# Altium PCB Main.PcbDoc (part 2 of 2)
Units mil, origin at the board's own origin, x right, y up, seen from the top; angles counter-clockwise.
Board outline 5000 x 4200 mil, 4 copper layers (Top Layer, Gnd 1, Power, Gnd 2), stack 62.4 mil thick; 162 components, 132 nets, 664 pads, 567 vias.
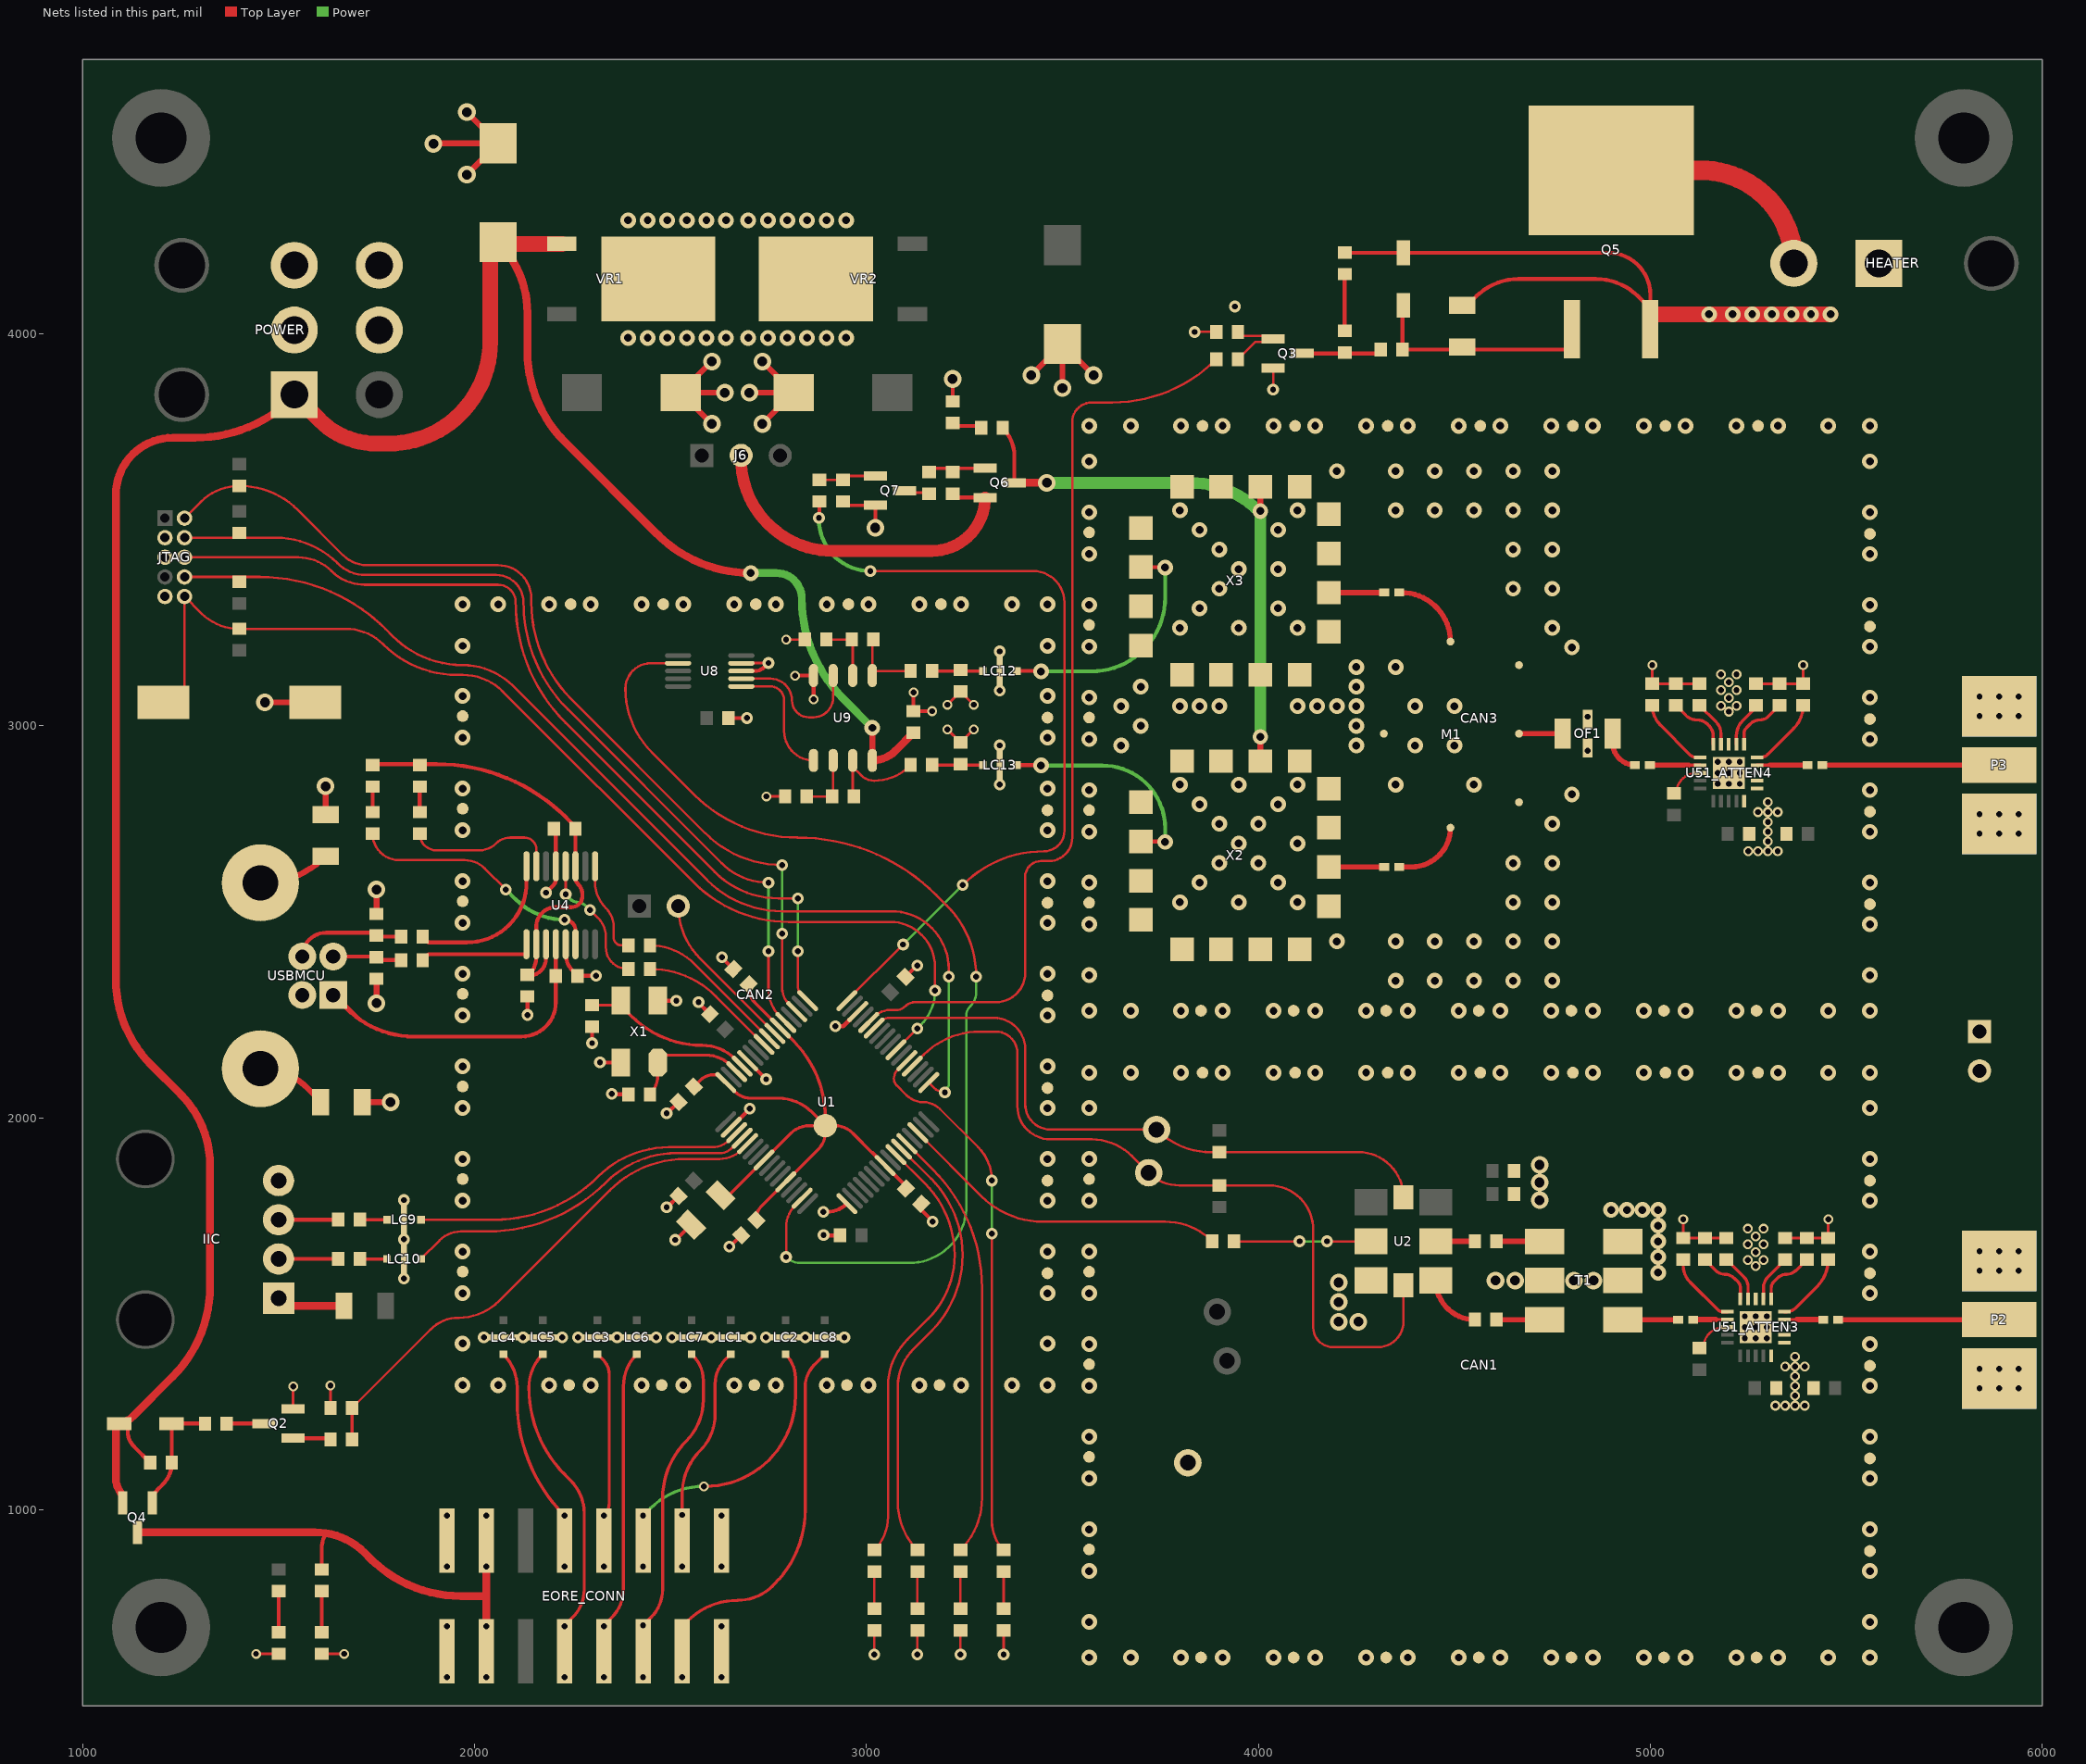
[diagram p4: the nets of this part, all layers, seen from the top]

## Via types
v1: diameter 40, hole 20, Top Layer to Gnd 2, tented both sides, 312 vias
v2: diameter 25, hole 15, Top Layer to Gnd 2, tented both sides, 105 vias
v3: diameter 30, hole 15, Top Layer to Gnd 2, tented both sides, 93 vias
v4: diameter 45, hole 25, Top Layer to Gnd 2, tented both sides, 37 vias
v5: diameter 25, hole 15, Top Layer to Gnd 2, 18 vias
v6: diameter 50, hole 30, Top Layer to Gnd 2, tented both sides, 1 vias
v7: diameter 60, hole 40, Top Layer to Gnd 2, tented both sides, 1 vias

## Nets (pads, with @x,y where several pads share a name; then routed paths per layer and width w, separated by ;. In a path a pad name is that pad's centre, name@x,y a point inside that pad or via, vN(x,y) a via of type N, cw(c..) or ccw(c..) an arc to the next point about the centre after c; other vN are vias at no path point) (continued)
GND: C4.1 C5.1 C6.1 C7.1 C8.1 C9.1 C10.1 C12.1 C14.1 C15.1 C16.1 C19.1 C20.1 C21.1 C22.1 C54_ATTEN3.1 C54_ATTEN4.1 C56_ATTEN3.1 C56_ATTEN4.1 CAN1.1 CAN2.1 CAN3.1 CB6.2 CB7.2 CB8.2 CBP2.2 CR3.2 CR4.2 CU1.1 CU2.1 CU3.1 CX1.1 CX2.1 EORE_CONN.1 EORE_CONN.2 EORE_CONN.15 EORE_CONN.16 GND.1 GND.2 HEATER.1 IIC.4 JTAG.3 JTAG.5 JTAG.9 LC1.2 LC2.2 LC3.2 LC4.2 LC5.2 LC6.2 LC7.2 LC8.2 LC9.2 LC10.2 LC12.2 LC13.2 M1.4 M1.5 M1.6 OF1.2 OF1.4 P2.2 P3.2 POWER.2 POWER.5 Q2.2 Q3.2 Q7.2 R19.2 R21.1 R45.1 R51_ATTEN3.2 R51_ATTEN4.2 R52_ATTEN3.2 R52_ATTEN4.2 R53_ATTEN3.2 R53_ATTEN4.2 R54_ATTEN3.2 R54_ATTEN4.2 R55_ATTEN3.2 R55_ATTEN4.2 R56_ATTEN3.2 R56_ATTEN4.2 RC3.1 RC4.1 RD8.2 RD9.2 RD10.2 RD11.2 RESET.2 RG2.1 RG4.1 RL1.2 RL2.2 RLED8.2 T1.2 T1.3 T1.5 TP5.1 U1.2 U1.17 U1.46 U1.60 U2.3 U4.5 U4.13 U8.3 U8.4 U9.4 U51_ATTEN3.10 U51_ATTEN3.11 U51_ATTEN3.12 U51_ATTEN3.18 U51_ATTEN3.21 U51_ATTEN4.10 U51_ATTEN4.11 U51_ATTEN4.12 U51_ATTEN4.18 U51_ATTEN4.21 USBMCU.4 VR1.4 VR2.4 X1.2 X1.4 X2.1 X2.3 X2.4 X2.5 X2.6 X2.7 X2.8 X2.9 X2.11 X2.12 X2.13 X2.15 X2.16 X3.1 X3.3 X3.4 X3.5 X3.6 X3.7 X3.8 X3.9 X3.11 X3.12 X3.13 X3.15 X3.16 | length 5117.6
  Top Layer w6: U8.4@2680.71,3160.32 v3(2750,3160.32) ; v3(3020,630.87) RD8.2@3020,692.44 ; v3(3130,630.87) RD9.2@3130,692.44 ; v3(3240,630.87) RL2.2@3240,692.44 ; v3(3350,630.87) RL1.2@3350,692.44 ; v3(3837.44,4005) R45.1@3892.44,4005 ; v3(4037.6,3857.6) Q3.2@4037.6,3912.6
  Top Layer w7: v2(1442.56,632.44) RLED8.2@1500,632.44 ; Q2.2@1537.4,1257.4 v2(1537.4,1314.84) ; RD10.2@1610,632.44 v2(1667.44,632.44) ; RG2.1@1632.44,1260 v2(1632.44,1317.44) ; v2(2745,2820) R21.1@2792.44,2820 ; v2(2795,3220) R19.2@2842.44,3220 ; v2(3206.45,2991.1) C21.1@3240,2957.56 v2(3273.55,2991.1) ; v2(3206.45,3053.9) C22.1@3240,3087.44 v2(3273.55,3053.9) ; R54_ATTEN4.2@5005,3107.56 v2(5005,3155) ; R54_ATTEN4.2@5015,3107.56 R55_ATTEN4.2@5125,3107.56 ; v2(5084,1740.77) R54_ATTEN3.2@5084,1693.33 R55_ATTEN3.2@5194,1693.33 ; R51_ATTEN4.2@5275,3107.56 R52_ATTEN4.2@5385,3107.56 ; R51_ATTEN3.2@5344,1693.33 R52_ATTEN3.2@5454,1693.33 v2(5454,1740.77) ; R52_ATTEN4.2@5390,3107.56 v2(5390,3155)
  Top Layer w8: RG4.1@2940,3572.44 ccw(c2949.84,3572.44) 2949.84,3562.6 Q7.2@3022.6,3562.6
  Top Layer w10: v3(2135,2262.44) CU2.1@2135,2309.88 ; v3(2182.5,2574.41) 2200,2591.91 ccw(c2181.89,2610.02) 2207.5,2610.02 U4.5@2207.5,2641.85 CU3.1@2207.5,2732.38 ; U4.13@2232.5,2443.03 2232.5,2419.39 ccw(c2297.41,2419.39) 2251.51,2373.49 CU1.1@2262.56,2362.44 v3(2310,2362.44) ; v3(2300,2190.43) CX2.1@2300,2232.44 ; v3(2320,2141.26) X1.4@2372.76,2141.26 ; v3@2350.43,2060 CX1.1@2392.44,2060 ; X1.2@2467.24,2298.74 v3(2515,2298.74) ; v3@2490.81,1770.81 C7.1@2520.51,1800.51 ; v3@2490.81,2010.81 C14.1@2520.51,2040.51 ; v3@2512.71,1687.71 C9.1@2552.42,1727.42 ; v3@2570.81,2294.19 C15.1@2600.51,2264.49 ; v3@2630.81,2409.19 C8.1@2660.51,2379.49 ; C19.1@2647.56,3020 v3(2695,3020) ; v3@2650.81,1670.81 C10.1@2680.51,1700.51 ; U1.2@2655.02,1975.97 v3(2702.22,2023.17) ; U8.3@2680.71,3140 2715.54,3140 ccw(c2715.54,3174.14) v3@2739.66,3149.98 ; U1.60@2696.78,2145.79 v3(2743.98,2098.58) ; v3@2739.68,3150 v3(2750,3160.32) ; v2(2817.56,3128.27) U9.4@2865,3128.27 v2(2865,3067.56) ; v3(2890,1760) 2899.17,1760 ccw(c2899.17,1832.04) U1.17@2950.11,1781.1 ; v3@2890.43,1700 C16.1@2932.44,1700 ; v3(2920.74,2233.86) 2940.74,2233.86 U1.46@2977.95,2271.06 ; v4(3022.6,3505.16) Q7.2@3022.6,3562.6 ; C6.1@3099.49,2359.49 v3@3129.19,2389.19 ; v2(3120,3085) C20.1@3120,3037.56 v2(3167.44,3037.56) ; C12.1@3139.49,1780.51 3139.49,1765.51 v3@3169.19,1735.81 ; RD11.2@3220,3827.56 v4(3220,3885)
  Top Layer w15: v4(1465.24,3060) RESET.2@1593.9,3060 ; RC3.1@1620,2773.15 v4(1620,2845.71) ; RC4.1@1713.15,2040 v4(1785.71,2040) ; v4(1750,2292.32) CR3.2@1750,2354.88 ; CR4.2@1750,2520 v4(1750,2582.56) ; v4@1895,4485.98 CB8.2@2060,4485.98 ; v4(1980.41,4406.39) CB8.2@2060,4485.98 ; v4(1980.41,4565.58) CB8.2@2060,4485.98 ; v4(2605.58,3770.41) CB7.2@2525.98,3850 ; v4(2605.58,3929.59) CB7.2@2525.98,3850 ; v4(2638.54,3850) CB7.2@2525.98,3850 ; v4(2701.46,3850) CB6.2@2814.02,3850 ; v4(2734.42,3770.41) CB6.2@2814.02,3850 ; v4(2734.42,3929.59) CB6.2@2814.02,3850 ; v4(3420.41,3894.42) CBP2.2@3500,3974.02 ; v4(3500,3861.46) CBP2.2@3500,3974.02 ; v4(3579.59,3894.42) CBP2.2@3500,3974.02
  other v1: 3568.19,623.19 3674.49,623.19 3802.44,623.19 3908.74,623.19 4038.66,623.19 4144.96,623.19 4274.88,623.19 4381.18,623.19 4511.1,623.19 4617.4,623.19 4747.32,623.19 4853.62,623.19 4983.54,623.19 5089.84,623.19 5219.76,623.19 5326.06,623.19 5454.02,623.19 5560.31,623.19 3568.19,713.74 5560.31,713.74 3568.19,843.66 5560.32,843.66 3568.19,949.96 5560.32,949.96 3568.19,1079.88 5560.32,1079.88 3568.19,1186.18 5560.32,1186.18 3568.19,1316.1 5560.32,1316.1 1969.68,1318.19 2060.24,1318.19 2190.16,1318.19 2296.46,1318.19 2426.38,1318.19 2532.68,1318.19 2662.6,1318.19 2768.9,1318.19 2898.82,1318.19 3005.12,1318.19 3135.04,1318.19 3241.34,1318.19 3371.26,1318.19 3461.81,1318.19 3568.19,1422.4 5560.32,1422.4 1969.68,1424.49 3461.81,1424.49 1969.68,1552.44 3461.81,1552.44 3568.19,1552.32 5560.32,1552.32 5020,1605 5020,1645 1969.68,1658.74 3461.81,1658.74 3568.19,1658.62 5560.32,1658.62 5020,1685 5020,1725 4900,1765 4940,1765 4980,1765 5020,1765 1969.68,1788.66 3461.81,1788.66 3568.19,1788.54 5560.32,1788.54 1969.68,1894.96 3461.81,1894.96 3568.19,1894.84 5560.32,1894.84 1969.68,2024.88 3461.81,2024.88 3568.19,2024.76 5560.31,2024.76 3568.19,2115.32 3674.49,2115.32 3802.44,2115.32 3908.74,2115.32 4038.66,2115.32 4144.96,2115.32 4274.88,2115.32 4381.18,2115.32 4511.1,2115.32 4617.4,2115.32 4747.32,2115.32 4853.62,2115.32 4983.54,2115.32 5089.84,2115.32 5219.76,2115.32 5326.06,2115.32 5454.02,2115.32 5560.31,2115.31 1969.68,2131.18 3461.81,2131.18 1969.68,2261.1 3461.81,2261.1 3568.19,2273.19 3674.49,2273.19 3802.44,2273.19 3908.74,2273.19 4038.66,2273.19 4144.96,2273.19 4274.88,2273.19 4381.18,2273.19 4511.1,2273.19 4617.4,2273.19 4747.32,2273.19 4853.62,2273.19 4983.54,2273.19 5089.84,2273.19 5219.76,2273.19 5326.06,2273.19 5454.02,2273.19 5560.31,2273.19 4350,2350 4450,2350 4550,2350 4650,2350 4750,2350 3568.19,2363.74 5560.31,2363.74 1969.68,2367.4 3461.81,2367.4 4200,2450 4350,2450 4450,2450 4550,2450 4650,2450 4750,2450 3568.19,2493.66 5560.32,2493.66 1969.68,2497.32 3461.81,2497.32 3800,2550 3950,2550 4100,2550 4650,2550 4750,2550 3568.19,2599.96 3850,2600 4050,2600 5560.32,2599.96 1969.68,2603.62 3461.81,2603.62 3900,2650 4000,2650 4650,2650 4750,2650 3950,2700 4100,2700 3568.19,2729.88 5560.32,2729.88 1969.68,2733.54 3461.81,2733.54 3900,2750 4000,2750 4750,2750 3850,2800 4050,2800 4800,2825 3568.19,2836.18 5560.32,2836.18 1969.68,2839.84 3461.81,2839.84 3800,2850 3950,2850 4100,2850 4350,2850 4550,2850 3650,2950 4250,2950 4400,2950 4500,2950 3568.19,2966.1 5560.32,2966.1 1969.68,2969.76 3461.81,2969.76 3700,3000 4250,3000 3650,3050 3800,3050 3850,3050 3900,3050 4100,3050 4150,3050 4200,3050 4250,3050 4400,3050 4500,3050 3568.19,3072.4 5560.32,3072.4 1969.68,3076.06 3461.81,3076.06 3700,3100 4250,3100 4250,3150 4350,3150 4800,3200 3568.19,3202.32 5560.32,3202.32 1969.68,3204.02 3461.81,3204.02 3800,3250 3950,3250 4100,3250 4750,3250 3850,3300 4050,3300 3568.19,3308.62 5560.32,3308.62 1969.69,3310.32 2060.24,3310.32 2190.16,3310.32 2296.46,3310.32 2426.38,3310.32 2532.68,3310.32 2662.6,3310.32 2768.9,3310.32 2898.82,3310.32 3005.12,3310.32 3135.04,3310.32 3241.34,3310.32 3371.26,3310.32 3461.81,3310.31 3900,3350 4650,3350 4750,3350 3950,3400 4050,3400 3568.19,3438.54 5560.32,3438.54 3900,3450 4650,3450 4750,3450 3850,3500 4050,3500 3568.19,3544.84 5560.32,3544.84 3800,3550 4100,3550 4350,3550 4450,3550 4550,3550 4650,3550 4750,3550 4200,3650 4350,3650 4450,3650 4550,3650 4650,3650 4750,3650 3568.19,3674.76 5560.31,3674.76 3568.19,3765.32 3674.49,3765.32 3802.44,3765.32 3908.74,3765.32 4038.66,3765.32 4144.96,3765.32 4274.88,3765.32 4381.18,3765.32 4511.1,3765.32 4617.4,3765.32 4747.32,3765.32 4853.62,3765.32 4983.54,3765.32 5089.84,3765.32 5219.76,3765.32 5326.06,3765.32 5454.02,3765.32 5560.31,3765.31 2391.69,3990 2441.69,3990 2491.69,3990 2541.69,3990 2591.69,3990 2641.69,3990 2698.31,3990 2748.31,3990 2798.31,3990 2848.31,3990 2898.31,3990 2948.31,3990 2391.69,4290 2441.69,4290 2491.69,4290 2541.69,4290 2591.69,4290 2641.69,4290 2698.31,4290 2748.31,4290 2798.31,4290 2848.31,4290 2898.31,4290 2948.31,4290
  other v2: 1930,573 2630,573 1930,703 2630,703 1930,855 2630,855 1930,985 2630,985 5319,1265.77 5344,1265.77 5369,1265.77 5394,1265.77 5369,1290.77 5369,1315.77 5369,1340.77 5344,1365.77 5369,1365.77 5394,1365.77 5369,1390.77 5269,1622.07 5249,1637.07 5289,1637.07 5269,1657.07 5249,1677.07 5289,1677.07 5269,1697.07 5249,1717.07 5289,1717.07 5250,2680 5275,2680 5300,2680 5325,2680 5300,2705 5300,2730 5300,2755 5275,2780 5300,2780 5325,2780 5300,2805 4840,2936.5 4840,3023.5 5200,3036.3 5180,3051.3 5220,3051.3 5200,3071.3 5180,3091.3 5220,3091.3 5200,3111.3 5180,3131.3 5220,3131.3
  other v3: 2023.78,1440 2123.78,1440 2223.78,1440 2263.78,1440 2363.78,1440 2463.78,1440 2503.78,1440 2603.78,1440 2703.78,1440 2743.78,1440 2843.78,1440 2943.78,1440 1820,1590 2650.03,1671.59 2511.93,1688.49 1820,1690 2890.43,1701.1 3168.41,1735.03 2490.03,1771.59 1820,1790 2490.03,2011.59 2350.43,2061.1 2571.59,2294.97 3129.97,2388.41 2631.59,2409.97 3340,2850 3340,2950 3340,3090 3340,3190 3939.76,4069.9
  other v4: 4205,1480 4255,1480 4205,1530 4205,1580 4605,1585 4655,1585 4805,1585 4855,1585 4717.56,1790 4717.56,1835 4717.56,1880 1895,4485
  other v5: 5241,1437.77 5269,1437.77 5297,1437.77 5241,1465.77 5269,1465.77 5297,1465.77 5241,1493.77 5269,1493.77 5297,1493.77 5172,2852 5200,2852 5228,2852 5172,2880 5200,2880 5228,2880 5172,2908 5200,2908 5228,2908
HEAT: R43.1 U1.44 | length 2365.7
  Top Layer w6: U1.44@3005.79,2243.22 3021.7,2259.14 cw(c3060,2220.83) 3060,2275 3074.97,2275 ccw(c3074.97,2310.09) 3099.78,2285.28 cw(c3123.25,2261.81) 3102.11,2287.4 cw(c3123.25,2261.81) 3123.25,2295 3330,2295 ccw(c3330,2370) 3405,2370 3405,2615 cw(c3445,2615) 3445,2655 3465,2655 ccw(c3465,2715) 3525,2715 3525,3775 cw(c3575,3775) 3575,3825 3626.88,3825 ccw(c3626.88,4200.56) R43.1@3892.44,3935
HEAT_PWR: D17.1 D18.1 POWER.3 POWER.6 Q5.3 R49.2 | length 1963.9
  Top Layer w10: D17.1@4220,4207.56 4220,4206.93 D18.1@4370,4206.93 4893.07,4206.93 cw(c4893.07,4100) 5000,4100 Q5.3@5000,4065 ; R49.2@4520,4073.15 ccw(c4520,4104.9) 4542.45,4082.45 4555,4095 cw(c4663.64,3986.36) 4663.64,4140 4861.36,4140 cw(c4861.36,3986.36) 4970,4095 Q5.3@5000,4065 ; Q5.3@5000,4011.97 Q5.3@5000,4065
  Top Layer w40: Q5.3@5000,4000 5000,4050 v1(5150,4050) v1(5460,4050)
  other v1: 5210,4050 5260,4050 5310,4050 5360,4050 5410,4050
LV_CLK: EORE_CONN.12 LC2.1 | length 656.2
  Top Layer w8: v2(2585,1060) 2588.78,1060 ccw(c2588.78,1290) 2818.78,1290 2818.78,1336.34 ccw(c2733.42,1336.34) 2793.86,1396.62 ccw(c2733.42,1336.34) LC2.1@2793.78,1396.69
  Power w8: v2(2430,985) 2448.43,1003.43 cw(c2585,866.86) v2(2585,1060)
  other v2: 2430,855
LV_CS_1: EORE_CONN.14 LC1.1 | length 511
  Top Layer w8: EORE_CONN.14@2530,921 v2(2530,987) 2530,1041.36 cw(c2683.64,1041.36) 2530.27,1050.41 cw(c2683.64,1041.36) 2575,1150 ccw(c2481.38,1243.62) 2613.78,1243.62 2613.78,1321.34 cw(c2699.13,1321.34) 2638.74,1381.66 cw(c2699.13,1321.34) 2638.78,1381.69 LC1.1@2653.78,1396.69
  other v2: 2530,855
LV_CS_2: EORE_CONN.11 LC7.3 | length 744.4
  Top Layer w8: v2(2430,705) 2450,725 ccw(c2377.57,797.43) 2480,797.43 2480,1030.15 cw(c2684.85,1030.15) 2540,1175 ccw(c2434.31,1280.69) 2583.78,1280.69 2583.78,1330 ccw(c2495.19,1330) 2557.83,1392.64 LC7.3@2553.78,1396.69
  other v2: 2430,573
LV_CS_3: EORE_CONN.9 LC6.1 | length 717
  Top Layer w8: EORE_CONN.9@2330,705 2350,725 ccw(c2277.57,797.43) 2380,797.43 2380,1315.14 cw(c2495.33,1315.14) LC6.1@2413.78,1396.69
  other v2: 2330,573 2330,703
LV_SW_1: EORE_CONN.7 LC5.1 | length 757.1
  Top Layer w8: LC5.1@2173.78,1396.69 ccw(c2258.28,1312.2) 2142.88,1343.24 ccw(c2258.28,1312.2) 2138.78,1312.2 ccw(c2454.98,1312.2) 2231.39,1088.61 2245,1075 cw(c2160.5,990.5) 2280,990.5 2280,797.43 cw(c2177.57,797.43) 2250,725 EORE_CONN.7@2230,705
  other v2: 2230,573 2230,703
LV_SW_2: EORE_CONN.8 LC4.3 | length 453.5
  Top Layer w8: LC4.3@2073.78,1396.69 cw(c1989.28,1312.2) 2108.78,1312.2 2108.78,1277.65 ccw(c2522.65,1277.65) v2(2230,985)
  other v2: 2230,855
LV_SW_3: EORE_CONN.10 LC3.3 | length 425.6
  Top Layer w8: LC3.3@2313.78,1396.69 2328.78,1381.69 cw(c2292.57,1345.48) 2343.78,1345.48 2343.78,1018.26 cw(c2296.74,1018.26) v2(2330,985)
  other v2: 2330,855
MIXERV+: D10.1 Q6.3 X2.14 X3.14 | length 1490.9
  Top Layer w10: D10.1@3347.56,3760 cw(c3275.51,3687.95) 3377.4,3687.95 Q6.3@3377.4,3620
  Top Layer w15: X2.14@4005,2910 v1(4005,2972.01) ; v1(4005,3547.99) X3.14@4005,3610
  Top Layer w20: Q6.3@3377.4,3620 v4(3460,3620)
  Power w30: v4(3460,3620) 3827.26,3620 cw(c3827.26,3374.15) v1@4001.1,3547.99 ; v1(4005,2972.01) v1(4005,3547.99)
ND_EN: RG1.1 RG2.2 U1.5 | length 1342.7
  Top Layer w6: RG2.2@1687.56,1260 1887.55,1459.99 cw(c1960,1387.54) 1960,1490 ccw(c1960,1634.85) 2062.43,1532.43 2345,1815 cw(c2538.14,1621.86) 2538.14,1895 2625,1895 ccw(c2625,1973.62) U1.5@2680.56,1917.99 ; U1.5@2680.59,1918.03 U1.5@2696.78,1934.21
  Top Layer w8: RG1.1@1687.56,1180 RG2.2@1687.56,1260
NetC1_1: C1.1 U2.4 | length 156.9
  Top Layer w13.45: U2.4@4452.68,1584.76 ccw(c4552.44,1584.76) C1.1@4552.44,1485
  Top Layer w30: U2.4@4452.68,1584.76 U2.4@4452.68,1585
NetC1_2: C1.2 T1.6 | length 122.4
  Top Layer w13.45: C1.2@4607.56,1485 T1.6@4730,1485
NetC2_1: C2.1 U2.5 | length 99.8
  Top Layer w13.45: U2.5@4452.68,1685 C2.1@4552.44,1685
NetC2_2: C2.2 T1.4 | length 122.4
  Top Layer w13.45: C2.2@4607.56,1685 T1.4@4730,1685
NetC21_2: C21.2 LC13.1 R24.1 | length 129.1
  Top Layer w8: R24.1@3167.56,2900 LC13.1@3296.69,2900
NetC22_2: C22.2 LC12.1 R23.1 | length 129.1
  Top Layer w8: R23.1@3167.56,3140 LC12.1@3296.69,3140
NetC28_1: C28.1 T1.1 | length 141
  Top Layer w13.45: T1.1@4930,1485 C28.1@5070.98,1485
NetC30_1: C30.1 OF1.3 | length 112.5
  Top Layer w13.45: OF1.3@4904,2980 4904,2956.98 ccw(c4960.98,2956.98) C30.1@4960.98,2900
NetC32_2: C32.2 M1.1 | length 202.3
  Top Layer w13.45: C32.2@4359.02,3340 4365,3340 cw(c4365,3215) M1.1@4490,3215
NetC33_2: C33.2 M1.2 | length 188.1
  Top Layer w13.45: C33.2@4359.02,2640 4390,2640 ccw(c4390,2740) M1.2@4490,2740
NetCU1_2: CU1.2 U4.12 USBMCU.1 | length 908.6
  Top Layer w10: USBMCU.1@1639.37,2313.23 1674.56,2278.04 ccw(c1845,2448.48) 1707.66,2250.39 ; USBMCU.1@1639.37,2318.23 1700,2257.6 ; 1700.03,2257.56 ccw(c1821.09,2378.69) 1707.66,2250.39 ; CU1.2@2207.44,2362.44 2207.44,2294.88 cw(c2120,2294.88) 2120,2207.44 1845,2207.44 cw(c1845,2448.48) 1707.66,2250.39 ; CU1.2@2207.5,2362.44 U4.12@2207.5,2443.03
  Top Layer w25: USBMCU.1@1638.14,2300.58 ccw(c1573.58,2313.23) USBMCU.1@1639.37,2313.23
NetCX1_2: CX1.2 U1.62 X1.1 | length 318.5
  Top Layer w8: CX1.2@2447.56,2060 ccw(c2400.04,2107.52) 2455,2068.85 ccw(c2400.04,2107.52) 2467.24,2107.52 X1.1@2467.24,2141.26 2467.24,2153.35 cw(c2476.65,2153.35) 2470,2160 2590,2160 cw(c2590,2070.95) 2652.97,2133.92 U1.62@2668.94,2117.95
NetCX2_2: CX2.2 U1.61 X1.3 | length 452.6
  Top Layer w8: CX2.2@2300,2287.56 2372.76,2287.56 X1.3@2372.76,2298.74 ccw(c2400.51,2298.74) 2380.88,2279.12 2400,2260 ccw(c2581.07,2441.07) 2581.07,2185 cw(c2581.07,2067.53) 2664.13,2150.59 U1.61@2682.86,2131.87
NetD1_1: D1.1 U1.37 | length 1390.1
  Top Layer w6: U1.37@3103.22,2145.79 3078.88,2121.45 ccw(c3100.33,2100) 3070,2100 ccw(c3094.14,2100) 3077.07,2082.93 3102.32,2057.68 ccw(c3145,2100.36) 3145,2040 cw(c3145,1979.64) 3187.68,2022.32 3284.64,1925.36 cw(c3199.29,1840) v3(3320,1840) ; v3(3320,1704.68) 3320,969.99 ccw(c3422.43,969.99) D1.1@3350,897.56
  Power w6: v3(3320,1704.68) v3(3320,1840)
NetD1_2: D1.2 RL1.1 | length 92.4
  Top Layer w6: RL1.1@3350,747.56 D1.2@3350,840
NetD2_1: D2.1 U1.28 | length 1112.4
  Top Layer w6: U1.28@3103.22,1934.21 3169.53,1867.9 cw(c2866.63,1565) 3169.61,1867.83 cw(c2866.63,1565) 3295,1565 3295,1030.34 cw(c3107.22,1030.34) D2.1@3240,897.56
NetD2_2: D2.2 RL2.1 | length 92.4
  Top Layer w6: RL2.1@3240,747.56 D2.2@3240,840
NetD5_1: D5.1 U1.26 | length 1122.3
  Top Layer w6: D5.1@3020,897.56 ccw(c2935.5,982.06) 3055,982.06 3055,1315 cw(c3223.99,1315) 3055.76,1330.98 cw(c3223.99,1315) 3104.5,1434.5 3157.82,1487.82 ; U1.26@3075.38,1906.37 3149.51,1832.25 cw(c2967.26,1650) 3225,1650 cw(c2995.65,1650) 3157.85,1487.85
NetD5_2: D5.2 RD8.1 | length 92.4
  Top Layer w6: RD8.1@3020,747.56 D5.2@3020,840
NetD6_1: D6.1 U1.27 | length 1139.4
  Top Layer w6: U1.27@3089.3,1920.29 3163.97,1845.63 cw(c2968.34,1650) 3164.01,1845.58 cw(c2968.34,1650) 3245,1650 cw(c2967.37,1650) 3163.74,1453.74 cw(c2967.37,1650) 3163.68,1453.68 3118.89,1408.89 ccw(c3212.78,1315) 3080.74,1328.98 ccw(c3212.78,1315) 3080,1315 3080,1018.27 ccw(c3250.71,1018.27) D6.1@3130,897.56
NetD6_2: D6.2 RD9.1 | length 92.4
  Top Layer w6: RD9.1@3130,747.56 D6.2@3130,840
NetD7_1: D7.1 EORE_CONN.3 EORE_CONN.4 Q4.3 | length 1312.2
  Top Layer w10: D7.1@1610,847.56 1610,898.5 cw(c1699.52,898.5) 1620.46,940.49
  Top Layer w20: Q4.3@1140,942.6 1593.02,942.6 cw(c1593.02,763.02) 1620.46,940.49 cw(c1593.02,763.02) 1720,890 1734.54,875.46 ccw(c1965,1105.92) 1965,780 2030,780 ; EORE_CONN.3@2030,639 2030,780 ; EORE_CONN.4@2030,921 2030,780
  other v2: 2030,573 2030,703 2030,855 2030,985
NetD7_2: D7.2 RD10.1 | length 92.4
  Top Layer w10: RD10.1@1610,687.56 D7.2@1610,780
NetD8_2: D8.2 Q4.1 R46.1 R47.1 | length 303.8
  Top Layer w10: Q4.1@1177.4,1017.4 1177.4,1019.58 cw(c1220.42,1019.58) 1190,1050 1204.62,1064.62 ccw(c1149.24,1120) R46.1@1227.56,1120 1227.56,1218.48 ccw(c1225.41,1218.48) D8.2@1226.93,1220 R47.1@1312.44,1220
NetD10_2: D10.2 RD11.1 | length 75.8
  Top Layer w10: RD11.1@3220,3772.44 ccw(c3237.96,3790.41) 3237.96,3765 3280.37,3765 cw(c3280.37,3747.93) D10.2@3292.44,3760
NetD17_2: D17.2 RD19.1 | length 144.9
  Top Layer w10: RD19.1@4220,4007.56 D17.2@4220,4152.44
NetD18_2: D18.2 Q5.1 R48.1 R49.1 | length 599.9
  Top Layer w10: D18.2@4370,4073.07 4367.56,4073.07 R48.1@4367.56,3960 4800,3960 Q5.1@4800,4011.97
NetDRX_2: DRX.2 RU4.1 | length 64.9
  Top Layer w10: RU4.1@1740,2780 DRX.2@1740,2844.88
NetDTX_2: DTX.2 RU3.1 | length 64.9
  Top Layer w10: RU3.1@1860,2780 DTX.2@1860,2844.88
NetEORE_CONN_13: EORE_CONN.13 LC8.3 | length 955.1
  Top Layer w8: EORE_CONN.13@2530,639 2530,703 2542.87,715.87 cw(c2671.35,587.4) 2671.35,769.09 ccw(c2671.35,896.42) 2702.02,772.84 ccw(c2671.35,896.42) 2761.38,806.38 2765,810 ccw(c2574.81,1000.19) 2843.78,1000.19 2843.78,1313.72 cw(c2923.39,1313.72) 2867.09,1370.01 LC8.3@2893.78,1396.69
  other v2: 2530,573
NetERASE_2: ERASE.2 U1.55 | length 418.5
  Top Layer w6: ERASE.2@2520,2540 ccw(c2708.89,2540) 2575.33,2406.43 U1.55@2766.37,2215.38
NetHEATER_2: HEATER.2 Q5.4 | length 601.6
  Top Layer w50: Q5.4@4900,4417.48 5128.52,4417.48 cw(c5128.52,4180) HEATER.2@5366,4180
NetIIC_1: IIC.1 R44.1 | length 186.9
  Top Layer w20: IIC.1@1500,1540 1500,1520 R44.1@1666.85,1520
NetIIC_2: IIC.2 R41.2 | length 152.4
  Top Layer w10: IIC.2@1500,1640 R41.2@1652.44,1640
NetIIC_3: IIC.3 R42.2 | length 152.4
  Top Layer w10: IIC.3@1500,1740 R42.2@1652.44,1740
NetJ3_1: J3.1 U2.2 | length 347
  Top Layer w6: J3.1@3940.34,1685 v3(4105,1685) ; v3(4175,1685) U2.2@4287.32,1685
  Power w6: v3(4105,1685) v3(4175,1685)
NetJ6_2: J6.2 Q6.2 R56.2 | length 931.6
  Top Layer w10: R56.2@3220,3592.44 ccw(c3229.84,3592.44) 3229.84,3582.6 Q6.2@3302.6,3582.6
  Top Layer w30: J6.2@2680,3690 2680,3681.21 ccw(c2915,3681.21) 2915,3446.21 3166.21,3446.21 ccw(c3166.21,3582.6) Q6.2@3302.6,3582.6
NetLC9_3: LC9.3 R42.1 | length 69.1
  Top Layer w8: R42.1@1707.56,1740 LC9.3@1776.69,1740
NetLC10_1: LC10.1 R41.1 | length 69.1
  Top Layer w8: R41.1@1707.56,1640 LC10.1@1776.69,1640
NetLC12_3: LC12.3 X3.2 | length 625
  Top Layer w10: LC12.3@3383.31,3140 v1@3445.31,3140 ; X3.2@3700,3405 v1@3762.01,3405
  Power w10: v1(3445.31,3138.9) 3573.9,3138.9 ccw(c3573.9,3327.01) 3762.01,3327.01 v1(3762.01,3403.9)
NetLC13_3: LC13.3 X2.2 | length 567
  Top Layer w10: LC13.3@3383.31,2900 v1@3445.31,2900 ; X2.2@3700,2705 v1@3762.01,2705
  Power w10: v1(3445.31,2898.9) 3602.01,2898.9 cw(c3602.01,2738.9) 3762.01,2738.9 v1(3762.01,2703.9)
NetLED8_2: LED8.2 RLED8.1 | length 92.4
  Top Layer w10: RLED8.1@1500,687.56 LED8.2@1500,780
NetM1_3: M1.3 OF1.1 | length 111
  Top Layer w13.45: M1.3@4665,2980 OF1.1@4776,2980
NetQ2_1: Q2.1 RG1.2 | length 95.7
  Top Layer w10: Q2.1@1537.4,1182.6 1626.17,1182.6 cw(c1626.17,1173.73) RG1.2@1632.44,1180
NetQ2_3: Q2.3 R47.2 | length 95
  Top Layer w10: R47.2@1367.56,1220 Q2.3@1462.6,1220
NetQ3_1: Q3.1 R43.2 R45.2 | length 207.9
  Top Layer w6: R43.2@3947.56,3935 3992.56,3980 Q3.1@4040.2,3980 ; R45.2@3947.56,4005 3957.56,3995 Q3.1@4040,3995
NetQ3_3: Q3.3 R48.2 RD19.2 | length 210
  Top Layer w10: Q3.3@4112.4,3950 4312.44,3950 R48.2@4312.44,3960
NetQ6_1: Q6.1 R56.1 R57.1 | length 148.2
  Top Layer w8: R57.1@3160,3647.56 cw(c3169.84,3647.56) 3169.84,3657.4 Q6.1@3302.6,3657.4
NetQ7_1: Q7.1 RG3.2 RG4.2 | length 137.6
  Top Layer w6: RG3.2@2880,3627.56 RG4.2@2940,3627.56
  Top Layer w7: RG4.2@2944.96,3637.4 Q7.1@3022.6,3637.4
NetQ7_3: Q7.3 R57.2 | length 66.9
  Top Layer w8: Q7.3@3097.4,3600 ccw(c3102.4,3600) 3102.4,3595 3157.44,3595 cw(c3157.44,3592.44) R57.2@3160,3592.44
NetR1_1: R1.1 U4.1 | length 243.4
  Top Layer w6: U4.1@2307.5,2641.85 2307.5,2601.39 ccw(c2401.39,2601.39) 2335,2535 cw(c2286.72,2486.72) 2355,2486.72 2355,2460 ccw(c2375,2460) 2375,2440 R1.1@2392.44,2440
NetR8_1: R8.1 U4.4 | length 338.6
  Top Layer w6: v3(2295,2530) 2315,2510 cw(c2266.72,2461.72) 2335,2461.72 2335,2435 ccw(c2390,2435) 2390,2380 R8.1@2392.44,2380
  Top Layer w8: v3(2232.5,2570) U4.4@2232.5,2641.85
  Power w8: v3@2237.5,2565 2244.28,2558.22 ccw(c2264.95,2578.9) 2248.73,2554.57 ccw(c2264.95,2578.9) 2264.95,2549.66 cw(c2260,2513.79) 2285.61,2539.39 v3(2295,2530)
NetR19_1: R19.1 R20.1 U9.2 | length 159.2
  Top Layer w7: R19.1@2897.56,3220 2965,3220 U9.2@2965,3128.27
NetR20_2: R20.2 R23.2 U9.1 | length 191.7
  Top Layer w6: U9.1@3015,3128.27 U9.1@3015,3140 ; R20.2@3017.56,3220 3015,3220 U9.1@3015,3140 ; R23.2@3112.44,3140 U9.1@3015,3140
NetR21_2: R21.2 R22.2 U9.6 | length 156.6
  Top Layer w6: R21.2@2847.56,2820 R22.2@2912.44,2820 ; R22.2@2915,2820 U9.6@2915,2911.73
NetR22_1: R22.1 R24.2 U9.7 | length 265.3
  Top Layer w6: U9.7@2965,2911.73 U9.7@2965,2895 ; R22.1@2967.56,2820 2965,2820 U9.7@2965,2895 ; 2985.86,2874.14 U9.7@2965,2895 ; 2985.88,2874.12 ccw(c3020,2908.28) 3020,2860 ccw(c3020,2986.6) R24.2@3109.49,2897.05 ; R24.2@3109.52,2897.08 R24.2@3112.44,2900
NetR51_ATTEN3_1: R51_ATTEN3.1 U51_ATTEN3.17 | length 120.9
  Top Layer w8: U51_ATTEN3.17@5288.69,1538.41 5288.69,1565.78 cw(c5330.01,1565.78) 5300.76,1594.97 ; 5300.79,1595 R51_ATTEN3.1@5344,1638.21
NetR51_ATTEN4_1: R51_ATTEN4.1 U51_ATTEN4.17 | length 120.4
  Top Layer w8: U51_ATTEN4.17@5219.69,2952.64 5219.69,2974.88 cw(c5273.39,2974.88) 5235.41,3012.86 R51_ATTEN4.1@5275,3052.44
NetR52_ATTEN3_1: R52_ATTEN3.1 U51_ATTEN3.15 | length 185.4
  Top Layer w8: U51_ATTEN3.15@5341.64,1505.14 5348.1,1505.14 ccw(c5348.1,1536.11) 5369.98,1514.19 5425.72,1569.93 ccw(c5357.43,1638.21) R52_ATTEN3.1@5454,1638.21
NetR52_ATTEN4_1: R52_ATTEN4.1 U51_ATTEN4.15 | length 188.2
  Top Layer w8: U51_ATTEN4.15@5272.64,2919.37 5280.51,2919.37 ccw(c5280.51,2946.93) 5299.99,2927.43 5365.25,2992.69 ; 5365.28,2992.72 ccw(c5305.5,3052.44) 5385,3023.81 ccw(c5305.5,3052.44) R52_ATTEN4.1@5390,3052.44
NetR53_ATTEN3_1: R53_ATTEN3.1 U51_ATTEN3.16 | length 149.7
  Top Layer w8: U51_ATTEN3.16@5308.37,1538.41 5308.37,1565.77 cw(c5331.01,1565.77) 5314.99,1581.76 5324.26,1591.03 ; 5324.28,1591.05 cw(c5347.78,1567.5) 5347.78,1600.77 ccw(c5347.78,1634.04) 5371.3,1610.52 R53_ATTEN3.1@5399,1638.21
NetR53_ATTEN4_1: R53_ATTEN4.1 U51_ATTEN4.16 | length 149.8
  Top Layer w8: U51_ATTEN4.16@5239.37,2952.64 5239.37,2981.41 cw(c5258.59,2981.41) 5245,2995 5255.26,3005.26 ; 5255.28,3005.28 cw(c5278.78,2981.73) 5278.78,3015 ccw(c5278.78,3048.27) 5302.3,3024.74 R53_ATTEN4.1@5330,3052.44
NetR54_ATTEN3_1: R54_ATTEN3.1 U51_ATTEN3.1 | length 187.7
  Top Layer w8: R54_ATTEN3.1@5084,1638.21 5084,1622.4 ccw(c5142.4,1622.4) 5101.11,1581.11 5171.71,1510.51 ccw(c5185,1523.8) 5182.7,1505.14 ccw(c5185,1523.8) 5185,1505 5196.22,1505 U51_ATTEN3.1@5196.36,1505.14
NetR54_ATTEN4_1: R54_ATTEN4.1 U51_ATTEN4.1 | length 190.9
  Top Layer w8: R54_ATTEN4.1@5005,3052.44 ccw(c5077.43,3052.44) 5015,3015.72 ccw(c5077.43,3052.44) 5026.21,3001.23 5101.22,2926.22 ccw(c5117.76,2942.76) 5117.76,2919.37 U51_ATTEN4.1@5127.36,2919.37
NetR55_ATTEN3_1: R55_ATTEN3.1 U51_ATTEN3.19 | length 121.3
  Top Layer w8: R55_ATTEN3.1@5194,1638.21 5240,1592.21 cw(c5217.51,1569.72) 5249.32,1569.72 U51_ATTEN3.19@5249.32,1538.41
NetR55_ATTEN4_1: R55_ATTEN4.1 U51_ATTEN4.19 | length 120.9
  Top Layer w8: R55_ATTEN4.1@5125,3052.44 5168.21,3009.24 ; 5168.22,3009.22 cw(c5138.97,2980) 5180.31,2980 U51_ATTEN4.19@5180.31,2952.64
NetR56_ATTEN3_1: R56_ATTEN3.1 U51_ATTEN3.20 | length 149.9
  Top Layer w8: R56_ATTEN3.1@5139,1638.21 5166.85,1610.36 ccw(c5190,1633.51) 5190,1600.77 cw(c5190,1566.97) 5213.88,1590.89 ; 5213.9,1590.87 5224.77,1580 ; 5224.78,1579.99 cw(c5213.04,1568.27) 5229.63,1568.27 U51_ATTEN3.20@5229.63,1538.41
NetR56_ATTEN4_1: R56_ATTEN4.1 U51_ATTEN4.20 | length 153.5
  Top Layer w8: R56_ATTEN4.1@5065,3052.44 5090.02,3027.42 ccw(c5120,3057.39) 5120,3015 cw(c5120,2978.79) 5145.61,3004.39 5150,3000 ; 5150.03,2999.97 cw(c5124.34,2974.34) 5160.63,2974.34 U51_ATTEN4.20@5160.63,2952.64
NetR57_ATTEN3_1: R57_ATTEN3.1 U51_ATTEN3.3 | length 91.7
  Top Layer w6: R57_ATTEN3.1@5135,1412.56 cw(c5188.21,1412.56) 5152.74,1452.23 cw(c5188.21,1412.56) 5188.21,1465.77 U51_ATTEN3.3@5196.36,1465.77
NetR57_ATTEN4_1: R57_ATTEN4.1 U51_ATTEN4.3 | length 91.7
  Top Layer w6: R57_ATTEN4.1@5066,2826.79 cw(c5119.21,2826.79) 5083.74,2866.45 cw(c5119.21,2826.79) 5119.21,2880 U51_ATTEN4.3@5127.36,2880
NetRC3_2: RC3.2 USBMCU.5 | length 184.1
  Top Layer w15: USBMCU.5@1453.94,2599.45 1457.28,2599.45 ccw(c1457.28,2829.57) RC3.2@1620,2666.85
NetRC4_2: RC4.2 USBMCU.6 | length 182.5
  Top Layer w15: USBMCU.6@1453.94,2125.43 cw(c1453.94,1954.92) 1574.51,2075.49 1605,2045 cw(c1600.53,2040.53) 1606.85,2040.53 RC4.2@1606.85,2040
NetRU5_2: RU5.2 U4.8 | length 400.4
  Top Layer w10: RU5.2@1867.56,2462.44 1882.56,2447.44 1980.63,2447.44 ccw(c1980.63,2599.31) 2132.5,2599.31 U4.8@2132.5,2641.85
NetRU6_2: RU6.2 U4.9 | length 296.7
  Top Layer w10: RU6.2@1867.56,2402.44 1882.56,2417.44 2132.5,2417.44 U4.9@2132.5,2443.03
NetU8_1: U8.1 U9.5 | length 325.7
  Top Layer w6: U8.1@2680.71,3100.63 2754.37,3100.63 cw(c2754.37,3065) 2790,3065 2790,2986.73 ccw(c2865,2986.73) U9.5@2865,2911.73
NetU8_2: U8.2 U9.3 | length 375.2
  Top Layer w6: U8.2@2680.71,3120.31 2754.69,3120.31 cw(c2754.69,3065) 2810,3065 ccw(c2853.09,3065) 2853.09,3021.91 2864.57,3021.91 ccw(c2864.57,3072.34) 2915,3072.34 U9.3@2915,3128.27
OSC_EN: J3.2 U1.30 | length 849.2
  Top Layer w6: U1.30@3131.06,1962.05 3293.14,1799.97 ccw(c3450,1956.83) 3450,1735 3761.73,1735 cw(c3761.73,1564.29) J3.2@3882.44,1685
RAWV+: C20.2 CB8.1 D8.1 POWER.1 Q4.2 R46.2 U9.8 VR1.1 | length 6461.8
  Top Layer w10: D8.1@1115,1220 1115,1200 ccw(c1169.46,1200) 1130.95,1161.49 R46.2@1172.44,1120
  Top Layer w15: U9.8@3015,2911.73 v1(3015,2995)
  Top Layer w20: Q4.2@1102.57,1037.43 cw(c1145.09,1079.89) 1085,1079.89 1085,1220 ccw(c1085,1280.36) 1127.68,1237.68 1230,1340 ccw(c1000.65,1569.35) 1325,1569.35 1325,1880 ccw(c1071.51,1880) 1250.75,2059.25 1175,2135 cw(c1392.28,2352.28) 1085,2352.28 1085,3590 cw(c1230,3590) 1230,3735 1286.51,3735 ccw(c1286.51,4093.49) 1539.94,3839.94 ccw(c1286.51,4093.49) POWER.1@1540,3840 ; CB8.1@2060,4234.02 cw(c1878.93,4052.95) 2135,4052.95 2135,3955 ccw(c2460.92,3955) 2230.46,3724.54 2466.01,3488.99 ccw(c2705,3727.99) v1(2705,3390) ; U9.8@3015,2911.73 ccw(c3015,2994.52) 3073.54,2935.98 C20.2@3120,2982.44
  Top Layer w40: POWER.1@1540,3845 1604.9,3780.1 ccw(c1750,3925.21) 1750,3720 1780,3720 ccw(c1780,3980) 2040,3980 2040,4214.02 cw(c2060,4214.02) CB8.1@2060,4234.02 ccw(c2070.26,4244.28) 2070.26,4229.76 VR1.1@2222.83,4229.76
  Power w20: v1(2705,3390) 2770,3390 cw(c2770,3325) 2835,3325 ccw(c3197.13,3325) 2941.07,3068.93 v1(3015,2995)
RESET: JTAG.10 R6.1 RESET.1 U1.39 | length 2851.4
  Top Layer w6: RESET.1@1206.1,3060 1260,3060 JTAG.10@1260,3330 1301.74,3288.26 ccw(c1400,3386.52) R6.1@1400,3247.56 1671.19,3247.56 cw(c1671.19,3111.75) 1767.22,3207.78 ccw(c1955,3395.56) 1955,3130 1970,3130 cw(c1970,2985.15) 2072.43,3087.57 2560,2600 ccw(c2801.42,2841.42) 2674.24,2524.57 ccw(c2801.42,2841.42) 2801.42,2500 3060,2500 cw(c3060,2385) 3175,2385 v3(3175,2325) ; U1.39@3075.38,2173.63 v3(3129.47,2227.71)
  Power w6: v3(3129.47,2227.71) 3138.4,2236.64 ccw(c3050.04,2325) v3(3175,2325)
"RF IN_ATTEN3": C28.2 U51_ATTEN3.2 | length 86.4
  Top Layer w8: 5166.64,1485.46 U51_ATTEN3.2@5196.36,1485.46
  Top Layer w13.45: C28.2@5110,1485.46 5166.64,1485.46
"RF IN_ATTEN4": C30.2 U51_ATTEN4.2 | length 127.4
  Top Layer w8: 5097.64,2899.68 U51_ATTEN4.2@5127.36,2899.68
  Top Layer w13.45: C30.2@5000,2899.68 5097.64,2899.68
"RF OUT": C29.2 P2.1 | length 411
  Top Layer w13.45: C29.2@5479.02,1485 P2.1@5890,1485
"RF OUT_ATTEN3": C29.1 U51_ATTEN3.14 | length 96.7
  Top Layer w8: U51_ATTEN3.14@5341.64,1485.46 5371.36,1485.46
  Top Layer w13.45: 5373.98,1485.46 C29.1@5440.98,1485.46
"RF OUT_ATTEN4": C31.1 U51_ATTEN4.14 | length 125.7
  Top Layer w8: U51_ATTEN4.14@5272.64,2899.68 5302.36,2899.68
  Top Layer w13.45: 5304.98,2899.68 C31.1@5400.98,2899.68
RF_1: C32.1 X3.10 | length 141
  Top Layer w13.45: X3.10@4180,3340 C32.1@4320.98,3340
RF_2: C33.1 X2.10 | length 141
  Top Layer w13.45: X2.10@4180,2640 C33.1@4320.98,2640
RXD: R8.2 U1.57 | length 360.5
  Top Layer w6: R8.2@2447.56,2380 cw(c2447.56,2142.15) 2615.75,2310.33 U1.57@2738.53,2187.55
RXLED: RU4.2 U4.14 | length 658.9
  Top Layer w6: RU4.2@1740,2724.88 ccw(c1807.44,2724.88) 1807.44,2657.44 1975,2657.44 cw(c1975,2585.01) 2026.21,2636.23 v3(2080,2582.44)
  Top Layer w10: v3(2230,2505.47) cw(c2230,2477.97) 2257.5,2477.97 U4.14@2257.5,2443.03
  Power w10: v3(2080,2582.44) 2105.33,2557.11 ccw(c2230,2681.79) v3(2230,2505.47)
SCL: RP1.1 TP1.1 U1.36 U2.8 | length 2005.8
  Top Layer w6: U1.36@3117.14,2131.87 3145.97,2160.7 cw(c3289.14,2017.53) 3289.14,2220 3330,2220 cw(c3330,2165) 3385,2165 3385,2030 ccw(c3470,2030) 3470,1945 3574.79,1945 cw(c3574.79,1799.64) 3677.57,1902.43 TP1.1@3720,1860 ccw(c3798.32,1938.32) 3798.32,1827.56 RP1.1@3900,1827.56 4027.44,1827.56 cw(c4027.44,1715) 4140,1715 4140,1465 ccw(c4190,1465) 4190,1415 4305,1415 ccw(c4305,1480) 4370,1480 U2.8@4370,1572.7
SCLK: U1.15 U8.7 | length 2732.1
  Top Layer w6: 2452.15,2932.85 cw(c2614.35,3095) 2385,3095 cw(c2449.68,3095) 2449.68,3159.68 U8.7@2519.29,3159.68 ; 2452.18,2932.82 2560.87,2824.13 ccw(c2824.33,3087.58) 2824.33,2715 cw(c2824.33,2215) 3177.88,2568.55 3204.74,2541.7 cw(c3023.04,2360) v3(3280,2360) ; v3(2795,1645) 2795,1720 cw(c2877.2,1720) 2819.08,1778.12 U1.15@2835.97,1795.02
  Power w6: v3(2795,1645) ccw(c2831.21,1681.21) 2818.36,1631.64 ccw(c2831.21,1681.21) 2831.21,1630 3110,1630 ccw(c3110,1775) 3187.36,1652.36 ccw(c3110,1775) 3232.64,1697.64 ccw(c3110,1775) 3255,1775 3255,2260.86 cw(c3289.14,2260.86) 3265,2285 ccw(c3228.79,2321.21) 3280,2321.21 v3(3280,2360)
SDA: RP2.1 TP2.1 U1.43 U2.7 | length 1663.3
  Top Layer w6: U1.43@3019.71,2229.3 3035.08,2244.68 cw(c3060,2219.76) 3060,2255 3325,2255 cw(c3325,2175) 3405,2175 3405,2035 ccw(c3470,2035) 3470,1970 TP2.1@3740,1970 ccw(c3878.96,2108.96) 3821.45,1921.05 ccw(c3878.96,2108.96) 3878.96,1912.44 RP2.1@3900,1912.44 4254.86,1912.44 cw(c4254.86,1797.3) U2.7@4370,1797.3
"SWEEP OUT": C31.2 P3.1 | length 435
  Top Layer w13.45: 5455,2900 P3.1@5890,2900
SWR_EN: RG3.1 U1.48 | length 2105.7
  Top Layer w6: U1.48@2950.11,2298.9 v3(3093.53,2442.32) ; v3(3010,3395) 3425,3395 cw(c3425,3315) 3505,3315 3505,2732.08 cw(c3452.92,2732.08) 3452.92,2680 ccw(c3452.92,2387.02) v3(3245.75,2594.19)
  Top Layer w10: v3@2880,3530.43 RG3.1@2880,3572.44
  Power w6: v3(3093.53,2442.32) v3@3245.6,2594.4
  Power w10: v3(2878.9,3530.43) 2878.9,3526.1 ccw(c3010,3526.1) v3(3010,3395)
TCK: JTAG.4 R2.1 U1.53 | length 2282
  Top Layer w6: JTAG.4@1260,3480 1493.08,3480 cw(c1493.08,3258.08) 1650,3415 ccw(c1722.43,3487.43) 1722.43,3385 2055,3385 cw(c2055,3315) 2125,3315 ccw(c2511.27,3315) 2126.13,3285.52 ccw(c2511.27,3315) 2238.14,3041.86 2630.5,2649.5 ccw(c2750,2768.99) v3(2750,2600) ; v3(2750,2425) 2750,2330 ccw(c2852.76,2330) 2780.1,2257.34 U1.53@2794.21,2243.22
  Power w6: v3@2750,2435 v3(2750,2600)
TDI: JTAG.8 R4.1 U1.33 | length 2730.1
  Top Layer w6: JTAG.8@1260,3380 1452.08,3380 cw(c1452.08,2926.33) 1714.28,3296.56 cw(c1452.08,2926.33) 1772.83,3247.17 ; 1772.88,3247.12 1790.75,3229.25 ccw(c1970,3408.49) 1837.53,3192.37 ccw(c1970,3408.49) 1970,3155 cw(c1970,2973.93) 2098.03,3101.97 2593.57,2606.43 ccw(c2785,2797.86) 2681.1,2547.87 ccw(c2785,2797.86) 2785,2527.14 3062.86,2527.14 cw(c3062.86,2380) 3210,2380 v3(3210,2360) ; U1.33@3176.72,2107.93 U1.33@3158.9,2090.11 3172.71,2076.31 ccw(c3200,2103.6) v3(3200,2065)
  Power w6: v3(3200,2065) ccw(c3175.86,2089.14) 3210,2089.14 v3(3210,2360)
TDO: JTAG.6 U1.49 | length 2269
  Top Layer w6: JTAG.6@1260,3430 1550.5,3430 cw(c1550.5,3310.5) 1580.96,3426.05 cw(c1550.5,3310.5) 1635,3395 ccw(c1719.5,3479.5) 1693.11,3362.95 ccw(c1719.5,3479.5) 1719.5,3360 2060,3360 cw(c2060,3315) 2105,3315 ccw(c2539.56,3315) 2105.62,3291.8 ccw(c2539.56,3315) 2232.28,3007.72 2612.82,2627.18 ccw(c2775,2789.35) 2775,2560 v3(2825,2560) ; v3(2825,2425) 2825,2337.08 ccw(c2857.08,2337.08) 2834.4,2314.4 U1.49@2849.89,2298.9
  Power w6: v3(2825,2425) v3(2825,2560)
TEMP_SCL: LC10.3 U1.4 | length 948.6
  Top Layer w6: LC10.3@1863.31,1640 1910.9,1687.59 cw(c1965,1633.49) 1965,1710 2033.22,1710 ccw(c2033.22,2136.78) 2335,1835 cw(c2516.07,1653.93) 2516.07,1910 2625.02,1910 ccw(c2625.02,1954.82) 2653.59,1920.29 ccw(c2625.02,1954.82) 2656.71,1923.13 ; 2656.71,1923.13 ccw(c2107.96,2523.03) U1.4@2682.86,1948.13 ccw(c2682.86,1945.38) 2680.92,1947.33 2656.71,1923.13
TEMP_SDA: LC9.1 U1.3 | length 867.6
  Top Layer w6: LC9.1@1863.31,1740 2049.44,1740 ccw(c2049.44,2115.56) 2315,1850 cw(c2496.07,1668.93) 2496.07,1925 2605,1925 ccw(c2605,1989.91) 2642.86,1937.19 ccw(c2605,1989.91) 2650.9,1944.01 U1.3@2668.94,1962.05
TMS: JTAG.2 R3.1 U1.51 | length 2405.2
  Top Layer w6: JTAG.2@1260,3530 1301.74,3571.74 cw(c1400,3473.48) R3.1@1400,3612.44 cw(c1400,3401.05) 1549.47,3550.53 1665,3435 ccw(c1725.36,3495.36) 1725.36,3410 2060,3410 cw(c2060,3325) 2142.8,3344.22 cw(c2060,3325) 2145,3325 2145,3315 ccw(c2495.06,3315) 2247.53,3067.47 2588.68,2726.32 ccw(c2785,2922.63) v3(2785,2645) ; v3(2785,2470) 2785,2330 ccw(c2837.84,2330) 2800.48,2292.64 U1.51@2822.05,2271.06
  Power w6: v3(2785,2470) v3(2785,2645)
TXD: R1.2 U1.56 | length 396.8
  Top Layer w6: R1.2@2447.56,2440 cw(c2447.56,2279.79) 2560.84,2393.08 U1.56@2752.45,2201.47
TXLED: RU3.2 U4.7 | length 390.7
  Top Layer w6: RU3.2@1860,2724.88 ccw(c1902.44,2724.88) 1902.44,2682.44 2012.61,2682.44 ccw(c2012.61,2742.39) 2055,2700 cw(c2091.21,2663.79) 2091.21,2715 2127.5,2715 cw(c2127.5,2685) 2157.5,2685 U4.7@2157.5,2641.85
U3V3: CU2.2 CU3.2 DRX.1 DTX.1 U4.3 U4.10 U4.11 | length 1144.8
  Top Layer w10: DRX.1@1740,2902.44 1903.19,2902.44 cw(c1903.19,2433.19) 2234.96,2765.04 ; U4.11@2182.5,2443.03 2182.5,2407.38 cw(c2137.56,2407.38) 2137.56,2362.44 ccw(c2089.42,2410.58) 2157.5,2410.58 U4.10@2157.5,2443.03 2157.5,2487.44 cw(c2207.5,2487.44) 2158.17,2495.61 cw(c2207.5,2487.44) 2199.33,2536.77 cw(c2207.5,2487.44) 2207.5,2537.44 2247.44,2537.44 ccw(c2247.44,2565) 2275,2565 2275,2570.86 ccw(c2240.86,2570.86) 2265,2595 cw(c2283.11,2613.11) 2257.5,2613.11 U4.3@2257.5,2641.85 2257.5,2737.44 ccw(c2092.5,2737.44) CU3.2@2257.5,2738.68 ; 2235,2765 2254.02,2745.98 cw(c2245.49,2737.44) CU3.2@2257.5,2738.68 ; CU3.2@2257.56,2737.44 ccw(c2245.49,2737.44) CU3.2@2257.5,2738.68
USB_N: CR3.1 RU6.1 USBMCU.2 | length 176.7
  Top Layer w10: USBMCU.2@1639.37,2411.65 CR3.1@1751.65,2411.65 ; CR3.1@1750,2410 ccw(c1768.25,2428.25) 1768.25,2402.44 RU6.1@1812.44,2402.44
USB_P: CR4.1 RU5.1 USBMCU.3 | length 268.9
  Top Layer w10: USBMCU.3@1560.63,2411.65 cw(c1621.42,2411.65) 1621.42,2472.44 1731.75,2472.44 ; CR4.1@1750,2464.88 ccw(c1755.89,2470.78) 1755.89,2462.44 RU5.1@1812.44,2462.44
VDDCORE: C8.2 C9.2 C10.2 C12.2 C14.2 pad.0 U1.8 U1.12 U1.24 U1.54 U1.64 | length 1721.4
  Top Layer w8: C14.2@2559.49,2079.49 2575.86,2095.86 cw(c2610,2061.72) 2610,2110 cw(c2610,2082.94) 2629.13,2102.07 U1.64@2641.1,2090.11 2664.39,2066.82 ccw(c2705,2107.44) 2705,2050 2775.5,2050 cw(c2775.5,1930.5) 2860,2015 pad.0@2895,1980 ; C9.2@2645.62,1799.54 U1.8@2738.53,1892.45 2805.63,1959.55 cw(c2855,1910.18) 2855,1980 pad.0@2895,1980 ; C8.2@2699.49,2340.51 2699.49,2331.24 ccw(c2750.49,2331.24) 2714.43,2295.17 U1.54@2780.29,2229.3 2813.97,2195.63 cw(c2618.34,2000) 2814.03,2195.57 cw(c2618.34,2000) 2895,2000 pad.0@2895,1980 ; C10.2@2719.49,1739.49 2719.49,1745.46 cw(c2759.54,1745.46) 2731.2,1773.77 ; 2731.22,1773.78 U1.12@2794.21,1836.78 2877.44,1920 ccw(c2835.03,1962.4) 2895,1962.4 pad.0@2895,1980 ; 3015.54,1910.54 2965,1961.08 ccw(c2919.32,1915.41) 2919.32,1980 pad.0@2895,1980
  Top Layer w10: 3015.54,1910.54 U1.24@3047.55,1878.53 3100.51,1825.57 C12.2@3100.51,1819.49
pads on no net: HEATER.0 IIC.0 JTAG.7 POWER.0 U1.11 U1.23 U1.25 U1.31 U1.32 U1.35 U1.38 U1.40 U1.41 U1.42 U1.47 U1.50 U1.52 U1.59 U1.63 U2.1 U4.2 U4.6 U4.15 U4.16 U8.10 U51_ATTEN3.0 U51_ATTEN3.7 U51_ATTEN3.8 U51_ATTEN4.0 U51_ATTEN4.7 U51_ATTEN4.8

## Polygon pours and split planes (outlines as drawn)
3V3 on Power "Bottom Layer-No Net" (solid, pour order 14): 1050,550 1050,3985 1900,3985 2215,4300 3625,4300 3975,3950 5950,3950 5950,550
HEAT_PWR on Power "Bottom Layer-No Net" (solid, pour order 11): 1050,4035 1875,4035 2190,4350 3650,4350 4000,4000 5950,4000 5950,4650 1050,4650
GND on Gnd 1 "Bottom Layer-No Net" (solid, pour order 13): 1050,550 5950,550 5950,4650 1050,4650 1050,655.13
GND on Gnd 2 "Gnd" (solid, pour order 10): 1050,550 5950,550 5950,4650 1050,4650 1050,639.13 1050,550
GND on Top Layer "Bottom Layer-No Net" (solid, pour order 12): 3568.19,2273.19 3568.19,3765.32 4838.75,3765.32 4850,3765.32 4850,2775 4850,2273.19 4500.2,2273.19
GND on Top Layer "Bottom Layer-No Net" (solid, pour order 17): 5195,2946.3 5205,2946.3 5205,3011.3 5235,3041.3 5235,3147.44 5165,3147.44 5165,3041.3 5195,3011.3
GND on Top Layer "Bottom Layer-No Net" (solid, pour order 15): 5347.46,2807.54 5290,2865 5260,2865 5260,2820 5240,2820 5240,2655 5347.46,2655
GND on Top Layer "Bottom Layer-No Net" (solid, pour order 16): 5416.46,1393.32 5359,1450.77 5329,1450.77 5329,1405.77 5309,1405.77 5309,1240.77 5416.46,1240.77
GND on Top Layer "Bottom Layer-No Net" (solid, pour order 18): 5264,1532.07 5274,1532.07 5274,1597.07 5304,1627.07 5304,1733.21 5234,1733.21 5234,1627.07 5264,1597.07

## Keep-outs
Keep-Out Layer:
  the board outline again, w10

## Other copper
Top Layer:
  region net GND: 2376.69,4315 2376.69,3965 2690,3965 2690,4315
  region net GND: 4885,1785 4885,1575 5040,1575 5040,1785
  region net GND: 4905,1610 4580,1610 4580,1560 4905,1560
  rectangle net GND: 4657.56,1770 4742.56,1900
  region net GND: 4175,1610 4175,1450 4300,1450 4300,1610
  region net GND: 2963.31,3965 2963.31,4315 2673.31,4315 2673.31,3965
  region net 3V3: 4600,1895 4495,1895 4435,1835 4435,1765 4600,1765
  pour cut-out: 4830,2900 4575,2900 4575,3075 4830,3075
  pour cut-out: 4125,3240 4125,3440 4570,3440 4570,3150 4400,3150 4400,3240
  pour cut-out: 4125,2740 4125,2540 4575,2540 4575,2825 4400,2825 4400,2740
  pour cut-out: 4055,2957.5 4055,2862.5 3955,2862.5 3955,2957.5
  pour cut-out: 4055,3657.5 4055,3562.5 3955,3562.5 3955,3657.5
  pour cut-out: 3750,3452.5 3750,3357.5 3650,3357.5 3650,3452.5
  pour cut-out: 3750,2752.5 3750,2657.5 3650,2657.5 3650,2752.5
Power:
  rectangle net HEAT_PWR: 5100,4005 5510,4100
  rectangle net HEAT_PWR: 1420,4095 1850,4325

## Silkscreen, mask and mechanical layers (free items; w line width, h text height)
Top Overlay:
  lines w8: 2090,3930 2090,4090
  lines w10: 1650,3930 1650,3470 ; 1860,3930 1860,3470 1650,3470 ; 1860,4090 1860,4390 1440,4390 1440,4090 ; 2090,3930 1440,3930 ; 2090,4090 1440,4090 ; 1440,3930 1440,3470 1650,3470 ; 1440,3930 1440,4090 ; 1000,500 6000,500 6000,4700 1000,4700 1000,500
  text "VHeat" at 1535,4290 h60
  text "Gnd" at 1885,3980 h60
  text "15V" at 1520,3675 h60 r270
  text "5V" at 1715,3670 h60 r270
  text "5V" at 2765,3525 h60 r90
  text "12V" at 2655,3475 h60 r90
  text "EORE Controller" at 1820,1140 h100
  text "Tigger board" at 1865,1050 h50
  text "3.3V+" at 1530,890 h60 r90
  text "15V+" at 1635,890 h60 r90
  text "R6," at 4075,535 h40
  text ".Print_Date" at 4280,535 h40
  text "C. Wolf" at 4750,530 h40
  text ".VersionControl_RevNumber" at 5040,530 h40
Top Solder:
  pour cut-out: 5045,1460.01 5135,1460.01 5135,1510.01 5045,1510.01
  pour cut-out: 5415,1460.01 5505,1460.01 5505,1510.01 5415,1510.01
Bottom Solder:
  pour cut-out: 5310.98,3180 5310.98,3130 5260.98,3130 5260.98,3180
  pour cut-out: 5397.56,1288 5397.56,1238 5347.56,1238 5347.56,1288
  pour cut-out: 5379.98,1765.77 5379.98,1715.77 5329.98,1715.77 5329.98,1765.77
Mechanical 2:
  lines w8: 1000,500 6000,500 6000,4695 6000,4700 1000,4700 1000,500

## Dimensions
1000,4700 to 1000,500 on Mechanical 1
1000,500 to 6000,500 on Mechanical 1

## Text inside footprints (layer, text, board x,y; h text height)
JTAG: Top Overlay "1" at 1190,3592.99 h39.37 r270; Top Overlay "9" at 1190,3274.09 h39.37 r270
P2: Mechanical 1 "Board Edge" at 6060,1755 h60 r270
P3: Mechanical 1 "Board Edge" at 6060,3170 h60 r270